# Altium PCB BinaryClock.PcbDoc
Units mm, origin at the board's own origin, x right, y up, seen from the top; angles counter-clockwise.
Board outline 205 x 150 mm, 2 copper layers (Top Layer, Bottom Layer), stack 1.58 mm thick; 113 components, 183 nets, 539 pads, 0 vias.
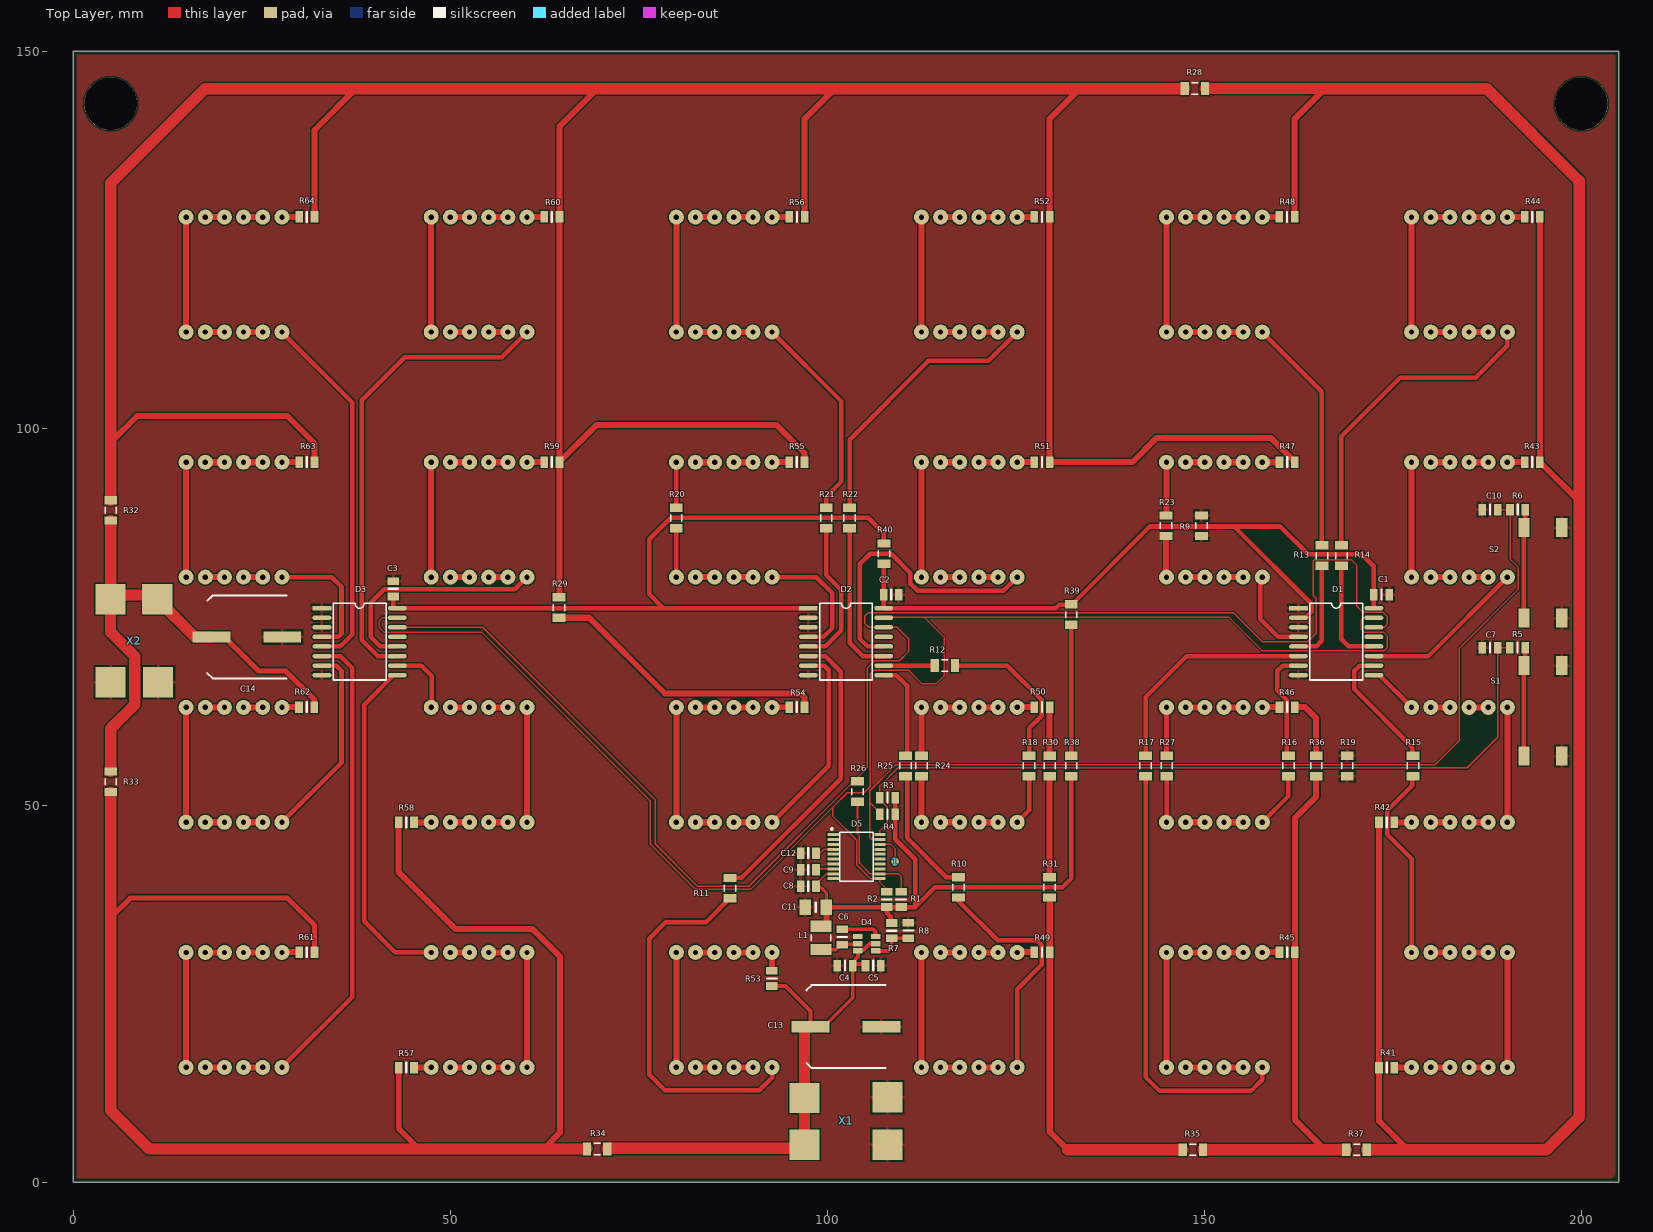
[diagram p0: Top Layer view]
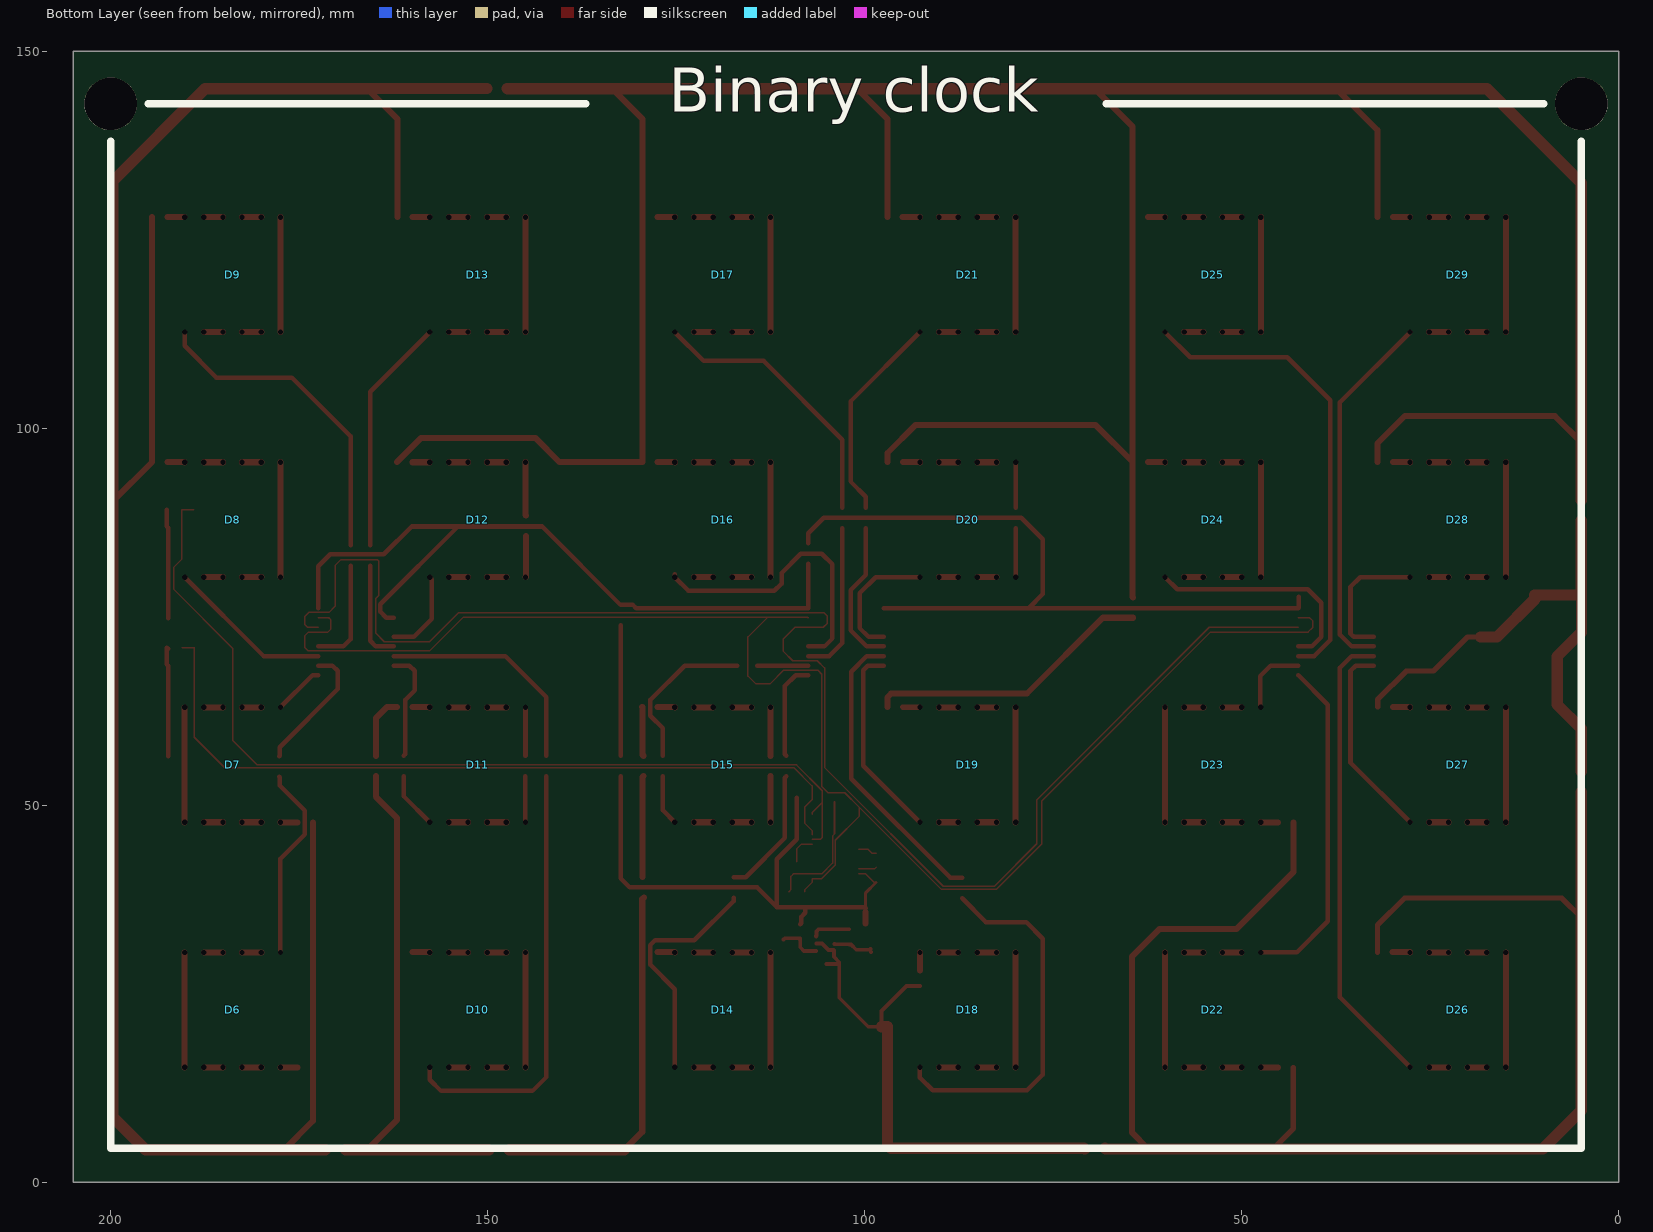
[diagram p1: Bottom Layer view, seen from below]
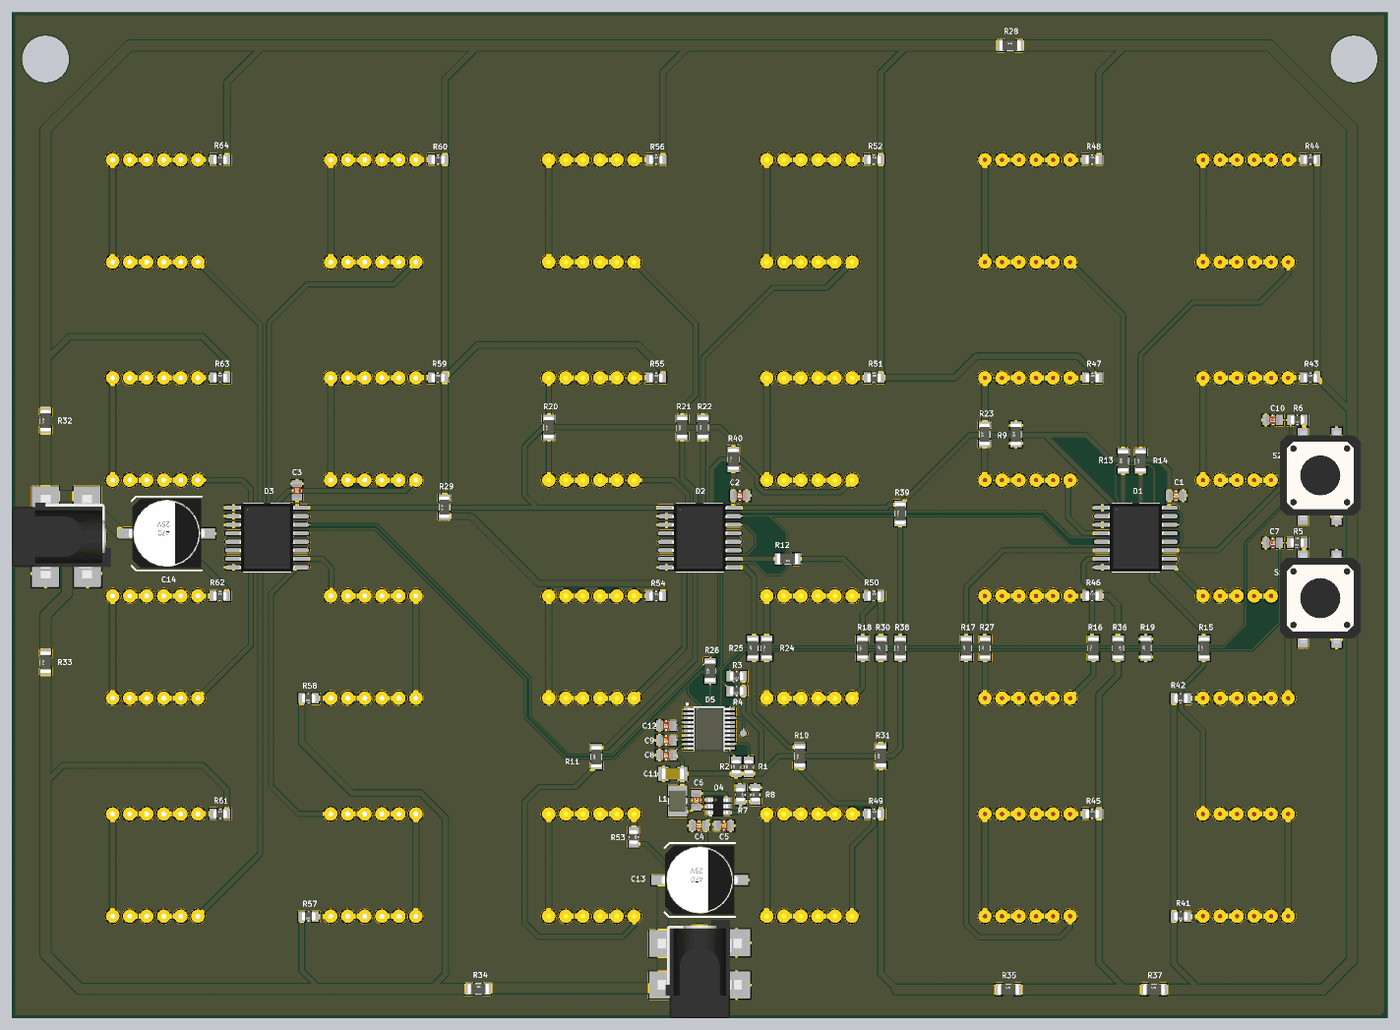
[diagram p2: 3D render of the assembled board from above, using the file's embedded part models]
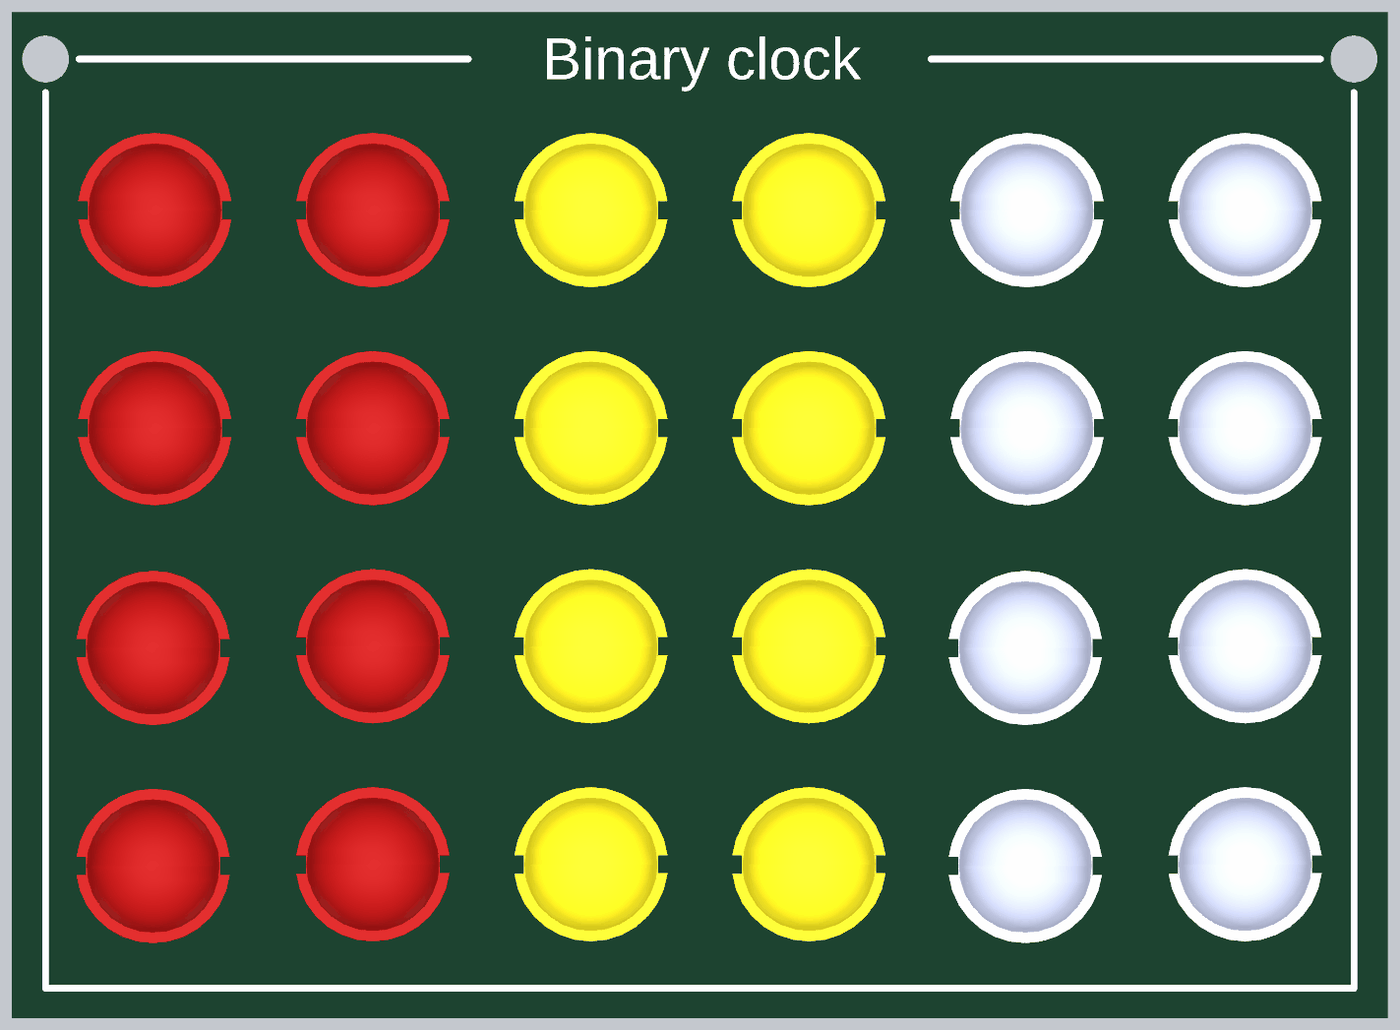
[diagram p3: 3D render of the assembled board from below, using the file's embedded part models]

## Layer stack, top to bottom
Top Solder: solder mask 0.0102, Solder Resist, Dk 3.5
Top Layer: signal copper 0.018
Dielectric 1: dielectric 1.5437, FR-4, Dk 4.8
Bottom Layer: signal copper 0.018
Bottom Solder: solder mask 0.0102, Solder Resist, Dk 3.5

## Board outline
0,0 205,0 205,150 0,150

## Design rules (kind name [scope] priority, off if disabled: settings)
Clearance [All] p1: gap=0.16 ignorepadtopadclearanceinfootprint=FALSE except(0: Arc-Hole Track-Hole SMDPad-Hole THPad-Hole Via-Hole Fill-Hole Poly-Hole Region-Hole Text-Hole)
ComponentClearance [All] p1: gap=0.1 collisioncheckmode=3 verticalgap=0.254 showdistances=FALSE
HoleSize [All] p1: absolutevalues=TRUE maxlimit=10 minlimit=0.025 maxpercent=80.000 minpercent=20.000
MinimumSolderMaskSliver [All] p1: minsoldermaskwidth=0.16
PolygonConnect [All] p1: connectstyle=Relief reliefconductorwidth=0.4 reliefentries=4 polygonreliefangle="90 Angle" airgapwidth=0.254
RoutingVias [All] p1: holewidth=0.711 width=1.27 viastyle="Through Hole" minholewidth=0.711 minwidth=1.27 maxholewidth=0.711 maxwidth=1.27
SolderMaskExpansion SolderMaskExpansion_LED [HasFootprint('DLA/6GD') OR HasFootprint('DLA/6YD')  OR HasFootprint('DLA/6ID')] p1: expansion=0.1 istentingtop=FALSE
SolderMaskExpansion [All] p2: expansion=0.202 istentingtop=FALSE
Width [All] p1: maxlimit=1.5 minlimit=0.16 preferedwidth=0.4 minimp=50.000000 maximp=50.000000 favimp=50.000000
27 further rules are at their usual default settings.

## Classes and differential pairs
component class BinaryClock_Control: 1 C1 C2 C3 C4 C5 C6 C7 C8 C9 C10 C11 C12 C13 C14 D1 D2 D3 D4 D5 L1 R1 R2 R3 R4 R5 R6 R7 R8 R9 R10 R11 R12 R13 R14 R15 R16 R17 R18 R19 R20 R21 R22 R23 R24 R25 R26 R27 R28 R29 R30 R31 R32 R33 R34 R35 R36 R37 R38 R39 R40 S1 S2 X1 X2
component class BinaryClock_LEDs: D6 D7 D8 D9 D10 D11 D12 D13 D14 D15 D16 D17 D18 D19 D20 D21 D22 D23 D24 D25 D26 D27 D28 D29 R41 R42 R43 R44 R45 R46 R47 R48 R49 R50 R51 R52 R53 R54 R55 R56 R57 R58 R59 R60 R61 R62 R63 R64

## Components (designator, comment, footprint, x,y, rotation, side; value= is the part's Value field where it differs from the comment)
1 "Point" point 109,42.5 r0 top
C1 "0805-16 V-X7R-0.1uF±10 %" SMD-0805C 173.5,77.919 r270 top value="0.1 uF"
C2 "0805-16 V-X7R-0.1uF±10 %" SMD-0805C 108.5,77.919 r270 top value="0.1 uF"
C3 "0805-16 V-X7R-0.1uF±10 %" SMD-0805C 42.475,78.681 r0 top value="0.1 uF"
C4 "0805-25 V-X5R-10uF±10 %" SMD-0805C 102.375,28.725 r90 top value="10 uF"
C5 "0805-50 V-X7R-0.1uF±10 %" SMD-0805C 106.1,28.725 r270 top value="0.1 uF"
C6 "0805-16 V-X7R-0.1uF±10 %" SMD-0805C 102,32.525 r180 top value="0.1 uF"
C7 "0805-16 V-X7R-0.1uF±10 %" SMD-0805C 187.9,70.875 r90 top value="0.1 uF"
C8 "0805-16 V-X7R-0.1uF±10 %" SMD-0805C 97.5,39.25 r90 top value="0.1 uF"
C9 "0805-16 V-X7R-1uF±10 %" SMD-0805C 97.5,41.45 r90 top value="1 uF"
C10 "0805-16 V-X7R-0.1uF±10 %" SMD-0805C 187.9,89.2 r90 top value="0.1 uF"
C11 "1206-16 V-X7R-22uF±10 %" SMD-1206C 98.5,36.45 r90 top value="22 uF"
C12 "0805-16 V-X7R-0.1uF±10 %" SMD-0805C 97.5,43.65 r90 top value="0.1 uF"
C13 "10x10.5-50 V-100 uF±20 %" CAP_10x10.5 102.5,20.625 r0 top value="100 uF"
C14 "10x10.5-50 V-100 uF±20 %" CAP_10x10.5 23.05,72.3 r0 top value="100 uF"
D1 "PCF8574T/3.512" SO-16 167.5,71.62 r0 top
D2 "PCF8574T/3.512" SO-16 102.5,71.62 r0 top
D3 "PCF8574T/3.512" SO-16 38.004,71.62 r0 top
D4 "TPS562200DDCT" SOT23-6_M 105.25,31.625 r0 top
D5 "STM8S103F3P6" TSSOP-20 103.9,43.175 r270 top
D6 "DLA/6ID" DLA/6ID 183.85,22.85 r0 bottom
D7 "DLA/6ID" DLA/6ID 183.85,55.35 r0 bottom
D8 "DLA/6ID" DLA/6ID 183.85,87.85 r180 bottom
D9 "DLA/6ID" DLA/6ID 183.85,120.35 r180 bottom
D10 "DLA/6ID" DLA/6ID 151.35,22.85 r180 bottom
D11 "DLA/6ID" DLA/6ID 151.35,55.35 r180 bottom
D12 "DLA/6ID" DLA/6ID 151.35,87.85 r180 bottom
D13 "DLA/6ID" DLA/6ID 151.35,120.35 r180 bottom
D14 "DLA/6YD" DLA/6YD 118.85,22.85 r180 bottom
D15 "DLA/6YD" DLA/6YD 118.85,55.35 r180 bottom
D16 "DLA/6YD" DLA/6YD 118.85,87.85 r180 bottom
D17 "DLA/6YD" DLA/6YD 118.85,120.35 r180 bottom
D18 "DLA/6YD" DLA/6YD 86.35,22.85 r180 bottom
D19 "DLA/6YD" DLA/6YD 86.35,55.35 r180 bottom
D20 "DLA/6YD" DLA/6YD 86.35,87.85 r180 bottom
D21 "DLA/6YD" DLA/6YD 86.35,120.35 r180 bottom
D22 "DLA/6SGD" DLA/6GD 53.85,22.85 r0 bottom
D23 "DLA/6SGD" DLA/6GD 53.85,55.35 r0 bottom
D24 "DLA/6SGD" DLA/6GD 53.85,87.85 r180 bottom
D25 "DLA/6SGD" DLA/6GD 53.85,120.35 r180 bottom
D26 "DLA/6SGD" DLA/6GD 21.35,22.85 r180 bottom
D27 "DLA/6SGD" DLA/6GD 21.35,55.35 r180 bottom
D28 "DLA/6SGD" DLA/6GD 21.35,87.85 r180 bottom
D29 "DLA/6SGD" DLA/6GD 21.35,120.35 r180 bottom
L1 "NLCV32T-4R7M-EF" 1210_M 99.2,32.4 r90 top value="4.7 uH"
R1 "0805±5 %-10 kOhm" SMD-0805-RES 109.8,37.5 r0 top value="10 kOhm"
R2 "0805±5 %-10 kOhm" SMD-0805-RES 107.9,37.5 r0 top value="10 kOhm"
R3 "0805±5 %-10 kOhm" SMD-0805-RES 108,51 r90 top value="10 kOhm"
R4 "0805±5 %-10 kOhm" SMD-0805-RES 108,48.775 r90 top value="10 kOhm"
R5 "0805±5 %-100 Ohm" SMD-0805-RES 191.55,70.9 r90 top value="100 Ohm"
R6 "0805±5 %-100 Ohm" SMD-0805-RES 191.575,89.2 r90 top value="100 Ohm"
R7 "0805±1 %-110 kOhm" SMD-0805-RES 108.575,33.35 r180 top value="110 kOhm"
R8 "0805±1 %-20 kOhm" SMD-0805-RES 110.775,33.375 r0 top value="20 kOhm"
R9 "1206±5 %-0 Ohm" R1206 149.625,87.05 r90 top value="0 Ohm"
R10 "1206±5 %-0 Ohm" R1206 117.4,39.1 r90 top value="0 Ohm"
R11 "1206±5 %-0 Ohm" R1206 87.1,39 r90 top value="0 Ohm"
R12 "1206±5 %-0 Ohm" R1206 115.6,68.5 r180 top value="0 Ohm"
R13 "1206±5 %-0 Ohm" R1206 165.6,83.1 r90 top value="0 Ohm"
R14 "1206±5 %-0 Ohm" R1206 168.2,83.1 r90 top value="0 Ohm"
R15 "1206±5 %-0 Ohm" R1206 177.675,55.2 r90 top value="0 Ohm"
R16 "1206±5 %-0 Ohm" R1206 161.175,55.2 r90 top value="0 Ohm"
R17 "1206±5 %-0 Ohm" R1206 142.225,55.2 r90 top value="0 Ohm"
R18 "1206±5 %-0 Ohm" R1206 126.775,55.2 r90 top value="0 Ohm"
R19 "1206±5 %-0 Ohm" R1206 168.975,55.2 r90 top value="0 Ohm"
R20 "1206±5 %-0 Ohm" R1206 80,88.075 r90 top value="0 Ohm"
R21 "1206±5 %-0 Ohm" R1206 99.875,88.075 r90 top value="0 Ohm"
R22 "1206±5 %-0 Ohm" R1206 102.975,88.075 r90 top value="0 Ohm"
R23 "1206±5 %-0 Ohm" R1206 144.95,87.05 r90 top value="0 Ohm"
R24 "1206±5 %-0 Ohm" R1206 112.5,55.2 r90 top value="0 Ohm"
R25 "1206±5 %-0 Ohm" R1206 110.4,55.2 r90 top value="0 Ohm"
R26 "1206±5 %-0 Ohm" R1206 104.025,51.8 r90 top value="0 Ohm"
R27 "1206±5 %-0 Ohm" R1206 145.025,55.2 r90 top value="0 Ohm"
R28 "1206±5 %-0 Ohm" R1206 148.75,145.025 r0 top value="0 Ohm"
R29 "1206±5 %-0 Ohm" R1206 64.45,76.2 r90 top value="0 Ohm"
R30 "1206±5 %-0 Ohm" R1206 129.525,55.2 r90 top value="0 Ohm"
R31 "1206±5 %-0 Ohm" R1206 129.5,39.1 r90 top value="0 Ohm"
R32 "1206±5 %-0 Ohm" R1206 5,89.1 r90 top value="0 Ohm"
R33 "1206±5 %-0 Ohm" R1206 5,53.1 r90 top value="0 Ohm"
R34 "1206±5 %-0 Ohm" R1206 69.5,4.4 r0 top value="0 Ohm"
R35 "1206±5 %-0 Ohm" R1206 148.5,4.3 r0 top value="0 Ohm"
R36 "1206±5 %-0 Ohm" R1206 164.85,55.2 r270 top value="0 Ohm"
R37 "1206±5 %-0 Ohm" R1206 170.2,4.3 r0 top value="0 Ohm"
R38 "1206±5 %-0 Ohm" R1206 132.375,55.2 r90 top value="0 Ohm"
R39 "1206±5 %-0 Ohm" R1206 132.375,75.275 r90 top value="0 Ohm"
R40 "1206±5 %-0 Ohm" R1206 107.525,83.35 r90 top value="0 Ohm"
R41 "0805±1 %-? kOhm" SMD-0805-RES 174.2,15.2 r90 top value="? Ohm"
R42 "0805±1 %-? kOhm" SMD-0805-RES 174.2,47.7 r90 top value="? Ohm"
R43 "0805±1 %-? kOhm" SMD-0805-RES 193.5,95.5 r270 top value="? Ohm"
R44 "0805±1 %-? kOhm" SMD-0805-RES 193.5,128 r270 top value="? Ohm"
R45 "0805±1 %-? kOhm" SMD-0805-RES 161,30.5 r270 top value="? Ohm"
R46 "0805±1 %-? kOhm" SMD-0805-RES 161,63 r270 top value="? Ohm"
R47 "0805±1 %-? kOhm" SMD-0805-RES 161,95.5 r270 top value="? Ohm"
R48 "0805±1 %-? kOhm" SMD-0805-RES 160.984,128 r270 top value="? Ohm"
R49 "0805±1 %-? kOhm" SMD-0805-RES 128.5,30.5 r270 top value="? Ohm"
R50 "0805±1 %-? kOhm" SMD-0805-RES 128.5,63 r270 top value="? Ohm"
R51 "0805±1 %-? kOhm" SMD-0805-RES 128.484,95.5 r270 top value="? Ohm"
R52 "0805±1 %-? kOhm" SMD-0805-RES 128.484,128 r270 top value="? Ohm"
R53 "0805±1 %-? kOhm" SMD-0805-RES 92.675,27.025 r180 top value="? Ohm"
R54 "0805±1 %-? kOhm" SMD-0805-RES 95.984,63 r270 top value="? Ohm"
R55 "0805±1 %-? kOhm" SMD-0805-RES 95.984,95.5 r270 top value="? Ohm"
R56 "0805±1 %-? kOhm" SMD-0805-RES 96,128 r270 top value="? Ohm"
R57 "0805±1 %-? kOhm" SMD-0805-RES 44.2,15.2 r90 top value="? Ohm"
R58 "0805±1 %-? kOhm" SMD-0805-RES 44.2,47.7 r90 top value="? Ohm"
R59 "0805±1 %-? kOhm" SMD-0805-RES 63.484,95.5 r270 top value="? Ohm"
R60 "0805±1 %-? kOhm" SMD-0805-RES 63.5,128 r270 top value="? Ohm"
R61 "0805±1 %-? kOhm" SMD-0805-RES 31,30.5 r270 top value="? Ohm"
R62 "0805±1 %-? kOhm" SMD-0805-RES 30.984,63 r270 top value="? Ohm"
R63 "0805±1 %-? kOhm" SMD-0805-RES 31,95.5 r270 top value="? Ohm"
R64 "0805±1 %-? kOhm" SMD-0805-RES 31,128 r270 top value="? Ohm"
S1 "1243SHIM-160G-G" 1243S 194.9,62.5 r90 top
S2 "1243SHIM-160G-G" 1243S 194.9,80.8 r90 top
X1 "DC-005-5A-2.5-SMT" PJ_2.5MM_SMT 102.5,8.125 r0 top
X2 "DC-005-5A-2.5-SMT" PJ_2.5MM_SMT 8.125,71.8 r270 top

## Footprints (in the part's own frame and the unit in brackets; to place one, negate y for a bottom-side part, rotate by r counter-clockwise, add the part's x,y. Pads: shape width x height; smd on the part's side, far side on the other; paste and mask are expansions set on the pad)
1210_M [mm] "Body 3.2x2.5mm, IPC Low Density"
  rect 1.5x2.8 smd: 1(-1.55,0) 2(1.55,0)
  silkscreen extent -0.4,-1.3 0.4,1.3, body extent -1.6,-1.25 1.6,1.25, height 1.9
1243S [mm] "12x12 tact button SMD"
  rect 2.5x1.5 smd: 1(6,2.5) 1_1(-6,2.5) 2(-6,-2.5) 2(6,-2.5)
  body extent -6.59,-6.08 6.86,5.92, height 4
CAP_10x10.5 [mm] "Aluminum electrolytic capacitor with size 10x10.5 mm"
  rect 5x1.5 smd: 1(-4.7,0) 2(4.7,0)
  silkscreen extent -5.25,-5.5 5.25,5.5, body extent -5.65,-5.15 5.65,5.15, height 10.8
DLA/6GD [mm] "20mm BIG LAMP"
  round 0 / inner round 0 / far side round 2 hole 0.7 unplated: 1(-6.35,7.62) 2(-3.81,7.62) 3(-1.27,7.62) 4(1.27,7.62) 5(3.81,7.62) 6(6.35,7.62) 7(6.35,-7.62) 8(3.81,-7.62) 9(1.27,-7.62) 10(-1.27,-7.62) 11(-3.81,-7.62) 12(-6.35,-7.62)
  body extent -11.29,-11.37 11.55,11.63, height 12.65
DLA/6ID [mm] "20mm BIG LAMP"
  round 0 / inner round 0 / far side round 2 hole 0.7 unplated: 1(-6.35,7.62) 2(-3.81,7.62) 3(-1.27,7.62) 4(1.27,7.62) 5(3.81,7.62) 6(6.35,7.62) 7(6.35,-7.62) 8(3.81,-7.62) 9(1.27,-7.62) 10(-1.27,-7.62) 11(-3.81,-7.62) 12(-6.35,-7.62)
  body extent -11.29,-11.37 11.55,11.63, height 12.65
DLA/6YD [mm] "20mm BIG LAMP"
  round 0 / inner round 0 / far side round 2 hole 0.7 unplated: 1(-6.35,7.62) 2(-3.81,7.62) 3(-1.27,7.62) 4(1.27,7.62) 5(3.81,7.62) 6(6.35,7.62) 7(6.35,-7.62) 8(3.81,-7.62) 9(1.27,-7.62) 10(-1.27,-7.62) 11(-3.81,-7.62) 12(-6.35,-7.62)
  body extent -11.29,-11.37 11.55,11.63, height 12.65
PJ_2.5MM_SMT [mm] "Power jack 2.5mm SMT"
  rect 4x4 smd: 1(-5.5,-3.15) 1(-5.5,3.05) 2(5.5,-3.15) 2(5.5,3.15)
  body extent -6.25,-8.1 6.25,6.6, height 11
point [mm] "Point; 1 Position"
  round 1 smd: 1(0,0)
R1206 [mm] "Chip resistor, Body 3.2x1.6mm, IPC High Density"
  rect 1.1x1.7 smd: 1(-1.35,0) 2(1.35,0)
  silkscreen extent -0.4,-0.75 0.4,0.75, body extent -1.6,-0.8 1.6,0.8, height 1
SMD-0805-RES [mil]
  rect 60x40 smd: 1(0,40) 2(0,-40)
  silkscreen extent -25,0 25,0, body extent -24,-39 26,39, height 31
SMD-0805C [mil]
  rect 60x40 smd: 1(0,40) 2(0,-40)
  silkscreen extent -25,0 25,0, body extent -25,-39 25,39, height 35
SMD-1206C [mil]
  rect 80x60 smd: 1(0,55) 2(0,-55)
  silkscreen extent -25,0 25,0, body extent -31,-63 32,63, height 39
SO-16 [mm]
  rect 2.5x0.6 smd: 1(-5,4.5)
  oval 2.5x0.6 smd: 2(-5,3.23) 3(-5,1.96) 4(-5,0.69) 5(-5,-0.58) 6(-5,-1.85) 7(-5,-3.12) 8(-5,-4.39) 9(5,-4.39) 10(5,-3.12) 11(5,-1.85) 12(5,-0.58) 13(5,0.69) 14(5,1.96) 15(5,3.23) 16(5,4.5)
  silkscreen extent -3.5,-5.02 3.5,5.14, body extent -5.15,-5.05 5.15,5.15
SOT23-6_M [mm] "SOT23, 6-Leads, Body 2.9x1.6mm, Pitch 0.95mm, Lead Span 2.7mm, IPC Low Density"
  rect 1.3x0.7 smd: 1(-1.2,0.95) 2(-1.2,0) 3(-1.2,-0.95) 4(1.2,-0.95) 5(1.2,0) 6(1.2,0.95)
  body extent -1.5,-1.5 1.5,1.5, height 1.3
TSSOP-20 [mm] "TSSOP, Plastic; 20 Leads; Body Width 5.3 mm; Pitch 0.65 mm"
  rect 0.4x1.5 smd: 1(-2.925,-3.1) 2(-2.275,-3.1) 3(-1.625,-3.1) 4(-0.975,-3.1) 5(-0.325,-3.1) 6(0.325,-3.1) 7(0.975,-3.1) 8(1.625,-3.1) 9(2.275,-3.1) 10(2.925,-3.1) 11(2.925,3.1) 12(2.275,3.1) 13(1.625,3.1) 14(0.975,3.1) 15(0.325,3.1) 16(-0.325,3.1) 17(-0.975,3.1) 18(-1.625,3.1) 19(-2.275,3.1) 20(-2.925,3.1)
  silkscreen extent -3.8,-3.4 3.25,2.2, body extent -3.15,-3.16 3.35,3.11, height 1.1

## Part data
C1 C2 C3 C6 C7 C8 C9 C10 C12: library part Cap, "Capacitor", Manufacturer=Murata, ComponentLink1Description=Datasheet
C4 C5 C11: library part Cap, "Capacitor", ComponentLink1Description=Datasheet
C13 C14: library part Cap_el, "Electrolytic capacitor", ComponentLink1Description=Datasheet
D1 D2 D3: library part PCF8574, "Remote 8-bit I/O expander for I2C bus", Manufacturer=NXP, ComponentLink1Description=Datasheet, ComponentLink1URL=https://www.nxp.com/docs/en/data-sheet/PCF8574_PCF8574A.pdf
D4: library part TPS562200, "4.5-V To 17-V Input, 2-A, 3-A Synchronous Step-Down Voltage Regulator", Manufacturer="Texas Instruments", ComponentLink1Description=Datasheet, ComponentLink1URL=http://www.ti.com/lit/ds/symlink/tps562200.pdf
D5: library part STM8S103FxP, "Access line, 16 MHz STM8S 8-bit MCU, up to 8 Kbytes Flash,   data EEPROM,10-bit ADC, 3 timers, UART, SPI, I²C", Manufacturer=STMicroelectronics, ComponentLink1Description=Datasheet, ComponentLink1URL=http://www.st.com/content/ccc/resource/technical/document/datasheet/ce/13/13/03/a9/a4/42/8f/CD00226640.pdf/files/CD00226640.pdf/jcr:content/translations/en.CD00226640.pdf
D6 D7 D8 D9 D10 D11 D12 D13 D14 D15 D16 D17 D18 D19 D20 D21 D22 D23 D24 D25 D26 D27 D28 D29: library part DLA, "20mm BIG LAMP", Manufacturer=Kingbright, ComponentLink1Description=Datasheet
  D6 D7 D8 D9 D10 D11 D12 D13: ComponentLink1URL=http://www.kingbright.com/attachments/file/psearch/000/00/00/DLA-6ID(Ver.14A).pdf
  D14 D15 D16 D17 D18 D19 D20 D21: ComponentLink1URL=http://www.kingbright.com/attachments/file/psearch/000/00/20160808bak/DLA-6YD(Ver.12A).pdf
  D22 D23 D24 D25 D26 D27 D28 D29: ComponentLink1URL=http://www.kingbright.com/attachments/file/psearch/000/00/20160808bak/DLA-6SGD(Ver.12A).pdf
L1: library part Inductor, "Inductor", Manufacturer=TDK, ComponentLink1Description=Datasheet, ComponentLink1URL=https://product.tdk.com/info/en/catalog/datasheets/inductor_commercial_decoupling_nlcv32-ef_en.pdf
R1 R2 R3 R4 R5 R6 R7 R8 R9 R10 R11 R12 R13 R14 R15 R16 R17 R18 R19 R20 R21 R22 R23 R24 R25 R26 R27 R28 R29 R30 R31 R32 R33 R34 R35 R36 R37 R38 R39 R40 R41 R42 R43 R44 R45 R46 R47 R48 R49 R50 R51 R52 R53 R54 R55 R56 R57 R58 R59 R60 R61 R62 R63 R64: library part Res, "Resistor", ComponentLink1Description=Datasheet
S1 S2: library part button, "Tact button SPST", Manufacturer=Switronic, ComponentLink1Description=Datasheet, ComponentLink1URL=http://www.voltmaster.ru/pdf/datasheets/switronic/Cata_A09.gif
X1 X2: library part Power_Jack_SMT_2.5mm, "Power jack 2.5 mm SMT connector", Manufacter="XKB Connectivity", Datasheet=https://datasheet.lcsc.com/lcsc/2208041700_XKB-Connectivity-DC-005-5A-2-5-SMT_C319133.pdf

## Free pads (board coordinates)
  round 7 hole 7 unplated mask+0: 2(5,143) 2(200,143)

## Nets (pads, with @x,y where several pads share a name; then routed paths per layer and width w, separated by ;. In a path a pad name is that pad's centre, name@x,y a point inside that pad or via, vN(x,y) a via of type N, cw(c..) or ccw(c..) an arc to the next point about the centre after c; other vN are vias at no path point)
5V: C1.2 C2.2 C3.2 C8.2 C11.2 D1.2 D1.16 D2.1 D2.16 D3.16 D5.9 L1.2 R1.2 R2.2 R3.2 R4.2 R7.2 R38.1 R38.2 R39.1 R39.2 R40.1 R40.2 | length 293.8
  Top Layer w0.2: C8.2@98.516,39.75 98.75,39.75 99.9,40.9 D5.9
  Top Layer w0.4: C8.2@98.516,39.75 99.897,38.369 99.897,36.312 C11.2@99.897,35.858
  Top Layer w0.6: C3.2@42.475,77.659 42.475,76.145 42.5,76.12 78.28,76.12 ; D2.1 78.28,76.12 ; C11.2@99.897,36.312 100.069,36.484 R2.2 ; R40.1 107.484,81.959 C2.2 107.484,76.136 D2.16 130.32,76.12 130.75,76.55 132.4,76.55 142.8,86.95 153.95,86.95 ; R40.2 107.525,86.05 105.45,88.125 79.275,88.125 76.4,85.25 76.4,78 78.28,76.12 ; R7.2@108.575,34.191 108.45,34.316 108.45,35.175 107.9,35.725 R2.2 ; R3.2 R4.2 109.016,45.484 111.684,42.816 111.684,36.484 ; R38.1@132.35,53.85 132.4,53.8 132.4,40.3 131.2,39.1 114.3,39.1 111.684,36.484 ; R38.2@132.35,56.55 132.4,56.6 R39.1@132.4,73.85 ; D1.2 163.45,74.85 164.275,75.675 164.275,76.625 153.95,86.95 ; D1.16 172.484,76.136 C1.2 172.484,81.666 170.9,83.25 163.775,83.25 160.075,86.95 153.95,86.95 ; R2.2 111.684,36.484
  Top Layer w0.8: L1.2@99.897,34.313 C11.2@99.897,35.858
15V: C4.2 C5.2 C13.1 C14.1 D4.3 D4.5 R28.1 R28.2 R29.1 R29.2 R30.1 R30.2 R31.1 R31.2 R32.1 R32.2 R33.1 R33.2 R34.1 R34.2 R35.1 R35.2 R36.1 R36.2 R37.1 R37.2 R41.1 R42.1 R43.1 R44.1 R45.1 R46.1 R47.1 R48.1 R49.1 R50.1 R51.1 R52.1 R53.1 R54.1 R55.1 R56.1 R57.1 R58.1 R59.1 R60.1 R61.1 R62.1 R63.1 R64.1 X1.1 X2.1 | length 1304
  Top Layer w0.5: R53.1 94.491,26.009 97.8,22.7 C13.1 99.55,20.625 103.391,24.466 C4.2 C4.2@103.391,28.925 ; C5.2@105.084,28.925 C4.2@103.391,28.925 ; D4.5 106.425,31.65 105.7,31.65 104.825,30.775 104.15,30.775 104.1,30.725 104.1,29.888 103.391,29.179 C4.2@103.391,28.925
  Top Layer w0.7: 5,35.1 7.6,37.7 28.4,37.7 32.016,34.084 R61.1 ; C14.1 20.1,72.3 24.6,67.8 28.2,67.8 32,64 R62.1 ; R57.1 43.184,7.116 45.9,4.4
  Top Layer w0.8: 5,98.1 8.5,101.6 28.4,101.6 32.016,97.984 R63.1 ; R64.1 32.016,139.516 37.5,145 ; R58.1 43.184,41.116 50.7,33.6 60.9,33.6 64.6,29.9 64.6,6.6 62.4,4.4 ; R29.1 68.45,74.85 78.5,64.8 96.5,64.8 97,64.3 R54.1 ; R29.2 64.5,77.6 R59.1 ; 69.5,145 64.516,140.016 R60.1 64.5,127.984 R59.1 ; R55.1 97,96.7 93.3,100.4 69.4,100.4 R59.1 ; R56.1 97.016,141.016 101,145 ; R31.1@129.3,37.75 129.516,37.534 R49.1 129.516,6.684 131.9,4.3 ; R30.1@129.375,53.85 129.5,53.725 R31.2 ; R30.2@129.375,56.55 129.5,56.675 129.5,62.984 R50.1 ; 133.5,145 129.5,141 R52.1 R51.1 140.5,95.5 143.7,98.7 158.846,98.7 162.016,95.53 R47.1 ; R48.1 162,141 166,145 165.975,145.025 ; R46.1 163.375,63 164.85,61.525 R36.1 ; R36.2 164.85,51.118 162.016,48.284 R45.1 162.016,8.284 166,4.3 ; R42.1 R41.1 173.184,8.116 177,4.3 ; R44.1 R43.1 199.716,90.3
  Top Layer w1.5: R33.1 5,35.1 5,9.5 10.1,4.4 45.9,4.4 62.4,4.4 68.05,4.4 R34.1@68.15,4.5 ; R33.2 5,60.15 8.2,63.35 8.2,69.712 4.975,72.937 4.975,77.3 4.975,77.9 X2.1@5,77.925 ; R32.1 X2.1@5,77.925 ; R32.2 5,98.1 5,132.5 17.5,145 37.5,145 69.5,145 101,145 133.5,145 147.375,145 R28.1 ; X2.1@11.175,77.3 16.175,72.3 C14.1 ; X2.1@11.175,77.875 5.05,77.875 X2.1@5,77.925 ; R34.2 70.95,4.5 96.525,4.5 97,4.975 97,11.175 97,20.625 C13.1 ; 131.9,4.3 R35.1 ; R35.2 166,4.3 R37.1 ; R28.2 165.975,145.025 ; 166,145 187.5,145 199.716,132.784 199.716,90.3 199.716,8.616 195.4,4.3 177,4.3 R37.2
BUTTON1: C7.2 D5.20 R3.1 R5.1 | length 105.3
  Top Layer w0.2: D5.20 107,46.625 107.95,47.575 107.95,49.78 106.984,50.746 R3.1 107,51.016 107,52.55 109.4,54.95 184.875,54.95 188.925,59 188.925,70.859 188.966,70.9 R5.1
BUTTON2: C10.2 D5.19 R4.1 R6.1 | length 126.7
  Top Layer w0.2: R4.1 106.984,49.029 105.653,50.36 ; D5.19 105.909,45.45 105.653,45.705 105.653,50.36 ; C10.2@188.966,89.2 R6.1 190.559,82.641 191.675,81.525 191.675,78.65 183.84,70.815 183.84,61.24 183.825,61.225 183.825,58.575 180.6,55.35 109.05,55.35 109.05,55.316 105.653,51.919 105.653,50.36
GND: C1.1 C2.1 C3.1 C4.1 C5.1 C7.1 C8.1 C9.1 C10.1 C11.1 C12.1 C13.2 C14.2 D1.1 D1.3 D1.8 D2.2 D2.3 D2.8 D3.1 D3.2 D3.3 D3.8 D4.1 D5.7 R8.1 R9.1 R9.2 R19.1 R19.2 S1.2 S2.2 X1.2 X2.2
LED1: D1.10 D6.12 R15.1 R15.2 | length 43.5
  Top Layer w0.6: D1.10 170.6,68.5 169.9,67.8 169.9,65.4 177.6,57.7 177.6,56.55 R15.2@177.675,56.475 ; D6.12 177.5,42.868 174.248,46.12 174.248,49.252 177.6,52.604 177.6,53.7 R15.1@177.675,53.775
LED1_1: D6.2 D6.3 | length 2.5
  Top Layer w0.8: D6.2 D6.3
LED1_2: D6.4 D6.5 | length 2.5
  Top Layer w0.8: D6.4 D6.5
LED1_3: D6.6 D6.7 | length 15.2
  Top Layer w0.8: D6.6 D6.7
LED1_4: D6.8 D6.9 | length 2.5
  Top Layer w0.8: D6.9 D6.8
LED1_5: D6.10 D6.11 | length 2.5
  Top Layer w0.8: D6.11 D6.10
LED2: D1.9 D7.12 | length 6.8
  Top Layer w0.6: D1.9 173.24,67.23 D7.12
LED2_1: D7.2 D7.3 | length 2.5
  Top Layer w0.8: D7.2 D7.3
LED2_2: D7.4 D7.5 | length 2.5
  Top Layer w0.8: D7.4 D7.5
LED2_3: D7.6 D7.7 | length 15.2
  Top Layer w0.8: D7.6 D7.7
LED2_4: D7.8 D7.9 | length 2.5
  Top Layer w0.8: D7.9 D7.8
LED2_5: D7.10 D7.11 | length 2.5
  Top Layer w0.8: D7.11 D7.10
LED3: D1.11 D8.12 | length 22
  Top Layer w0.6: D1.11 179.74,69.77 D8.12
LED3_1: D8.2 D8.3 | length 2.5
  Top Layer w0.8: D8.3 D8.2
LED3_2: D8.4 D8.5 | length 2.5
  Top Layer w0.8: D8.5 D8.4
LED3_3: D8.6 D8.7 | length 15.2
  Top Layer w0.8: D8.7 D8.6
LED3_4: D8.8 D8.9 | length 2.5
  Top Layer w0.8: D8.8 D8.9
LED3_5: D8.10 D8.11 | length 2.5
  Top Layer w0.8: D8.10 D8.11
LED4: D1.12 D9.12 R14.1 R14.2 | length 57.7
  Top Layer w0.6: R14.1 168.2,72 169.16,71.04 D1.12 ; R14.2 168.2,98.9 176,106.7 186,106.7 190.2,110.9 D9.12
LED4_1: D9.2 D9.3 | length 2.5
  Top Layer w0.8: D9.3 D9.2
LED4_2: D9.4 D9.5 | length 2.5
  Top Layer w0.8: D9.5 D9.4
LED4_3: D9.6 D9.7 | length 15.2
  Top Layer w0.8: D9.7 D9.6
LED4_4: D9.8 D9.9 | length 2.5
  Top Layer w0.8: D9.8 D9.9
LED4_5: D9.10 D9.11 | length 2.5
  Top Layer w0.8: D9.10 D9.11
LED5: D1.6 D10.12 R17.1 R17.2 | length 88.7
  Top Layer w0.6: R17.1 142.225,13.95 144.075,12.1 156.2,12.1 157.7,13.6 D10.12 ; R17.2 142.225,64.325 147.67,69.77 D1.6
LED5_1: D10.2 D10.3 | length 2.5
  Top Layer w0.8: D10.3 D10.2
LED5_2: D10.4 D10.5 | length 2.5
  Top Layer w0.8: D10.5 D10.4
LED5_3: D10.6 D10.7 | length 15.2
  Top Layer w0.8: D10.7 D10.6
LED5_4: D10.8 D10.9 | length 2.5
  Top Layer w0.8: D10.8 D10.9
LED5_5: D10.10 D10.11 | length 2.5
  Top Layer w0.8: D10.10 D10.11
LED6: D1.7 D11.12 R16.1 R16.2 | length 22.5
  Top Layer w0.6: D11.12 161.175,51.205 R16.1 ; R16.2 160.952,56.773 160.952,63.953 159.7,65.205 159.7,67.8 160.4,68.5 D1.7
LED6_1: D11.2 D11.3 | length 2.5
  Top Layer w0.8: D11.3 D11.2
LED6_2: D11.4 D11.5 | length 2.5
  Top Layer w0.8: D11.5 D11.4
LED6_3: D11.6 D11.7 R27.1 R27.2 | length 12.6
  Top Layer w0.6: D11.7 145.025,47.755 R27.1 ; D11.6 145,56.575 R27.2
LED6_4: D11.8 D11.9 | length 2.5
  Top Layer w0.8: D11.8 D11.9
LED6_5: D11.10 D11.11 | length 2.5
  Top Layer w0.8: D11.10 D11.11
LED7: D1.4 D12.12 | length 11.7
  Top Layer w0.6: D12.12 157.4,79.93 157.4,74.7 159.79,72.31 D1.4
LED7_1: D12.2 D12.3 | length 2.5
  Top Layer w0.8: D12.3 D12.2
LED7_2: D12.4 D12.5 | length 2.5
  Top Layer w0.8: D12.5 D12.4
LED7_3: D12.6 D12.7 R23.1 R23.2 | length 12.6
  Top Layer w0.8: R23.1 144.95,80.28 D12.7 ; R23.2 145,88.45 D12.6
LED7_4: D12.8 D12.9 | length 2.5
  Top Layer w0.8: D12.8 D12.9
LED7_5: D12.10 D12.11 | length 2.5
  Top Layer w0.8: D12.10 D12.11
LED8: D1.5 D13.12 R13.1 R13.2 | length 44.9
  Top Layer w0.6: D13.12 165.6,104.83 R13.2 ; D1.5 164.84,71.04 165.6,71.8 R13.1
LED8_1: D13.2 D13.3 | length 2.5
  Top Layer w0.8: D13.3 D13.2
LED8_2: D13.4 D13.5 | length 2.5
  Top Layer w0.8: D13.5 D13.4
LED8_3: D13.6 D13.7 | length 15.2
  Top Layer w0.8: D13.7 D13.6
LED8_4: D13.8 D13.9 | length 2.5
  Top Layer w0.8: D13.8 D13.9
LED8_5: D13.10 D13.11 | length 2.5
  Top Layer w0.8: D13.10 D13.11
LED9: D2.9 D14.12 R10.1 R10.2 R25.1 R25.2 | length 61.8
  Top Layer w0.6: D2.9 109.17,67.23 110.6,65.8 110.6,56.75 R25.2 ; R25.1 110.6,53.65 110.6,45.65 115.8,40.45 R10.2 ; R10.1 117.4,37.284 122.604,32.08 127.825,32.08 128.452,31.453 128.452,28.86 125.2,25.608 D14.12
LED9_1: D14.2 D14.3 | length 2.5
  Top Layer w0.8: D14.3 D14.2
LED9_2: D14.4 D14.5 | length 2.5
  Top Layer w0.8: D14.5 D14.4
LED9_3: D14.6 D14.7 | length 15.2
  Top Layer w0.8: D14.7 D14.6
LED9_4: D14.8 D14.9 | length 2.5
  Top Layer w0.8: D14.8 D14.9
LED9_5: D14.10 D14.11 | length 2.5
  Top Layer w0.8: D14.10 D14.11
LED10: D2.10 D15.12 R12.1 R12.2 R18.1 R18.2 | length 35
  Top Layer w0.6: D2.10 R12.2 ; R12.1 123.905,68.5 128.452,63.953 128.452,61.852 126.775,60.175 R18.2 ; D15.12 126.775,49.305 R18.1
LED10_1: D15.2 D15.3 | length 2.5
  Top Layer w0.8: D15.3 D15.2
LED10_2: D15.4 D15.5 | length 2.5
  Top Layer w0.8: D15.5 D15.4
LED10_3: D15.6 D15.7 R24.1 R24.2 | length 12.5
  Top Layer w0.8: D15.7 R24.1 ; R24.2 D15.6
LED10_4: D15.8 D15.9 | length 2.5
  Top Layer w0.8: D15.8 D15.9
LED10_5: D15.10 D15.11 | length 2.5
  Top Layer w0.8: D15.10 D15.11
LED11: D2.12 D16.12 | length 38.9
  Top Layer w0.6: D2.12 105.36,71.04 104.3,72.1 104.3,81.925 105.7,83.325 108.5,83.325 111.04,80.785 111.04,79.385 112,78.425 123.395,78.425 D16.12 D16.12@125.2,80.6
LED11_1: D16.2 D16.3 | length 2.5
  Top Layer w0.8: D16.3 D16.2
LED11_2: D16.4 D16.5 | length 2.5
  Top Layer w0.8: D16.5 D16.4
LED11_3: D16.6 D16.7 | length 15.2
  Top Layer w0.8: D16.7 D16.6
LED11_4: D16.8 D16.9 | length 2.5
  Top Layer w0.8: D16.8 D16.9
LED11_5: D16.10 D16.11 | length 2.5
  Top Layer w0.8: D16.10 D16.11
LED12: D2.11 D17.12 R22.1 R22.2 | length 57.6
  Top Layer w0.6: R22.1 103,86.7 103,71.5 104.73,69.77 D2.11 ; R22.2 102.975,98.475 113.4,108.9 121.37,108.9 D17.12
LED12_1: D17.2 D17.3 | length 2.5
  Top Layer w0.8: D17.3 D17.2
LED12_2: D17.4 D17.5 | length 2.5
  Top Layer w0.8: D17.5 D17.4
LED12_3: D17.6 D17.7 | length 15.2
  Top Layer w0.8: D17.7 D17.6
LED12_4: D17.8 D17.9 | length 2.5
  Top Layer w0.8: D17.8 D17.9
LED12_5: D17.10 D17.11 | length 2.5
  Top Layer w0.8: D17.10 D17.11
LED13: D2.6 D18.12 R11.1 R11.2 | length 89.7
  Top Layer w0.6: R11.1 83.95,34.5 78.6,34.5 76.4,32.3 76.4,14.275 78.5,12.175 91,12.175 92.7,13.875 D18.12 ; R11.2 88.65,40.35 101.8,53.5 101.8,67.7 99.73,69.77 D2.6
LED13_1: D18.2 D18.3 | length 2.5
  Top Layer w0.8: D18.3 D18.2
LED13_2: D18.4 D18.5 | length 2.5
  Top Layer w0.8: D18.5 D18.4
LED13_3: D18.6 D18.7 | length 15.2
  Top Layer w0.8: D18.7 D18.6
LED13_4: D18.8 D18.9 | length 2.5
  Top Layer w0.8: D18.8 D18.9
LED13_5: D18.10 D18.11 | length 2.5
  Top Layer w0.8: D18.10 D18.11
LED14: D2.7 D19.12 | length 26.2
  Top Layer w0.6: D19.12 100.2,55.23 100.2,67.9 99.6,68.5 D2.7
LED14_1: D19.2 D19.3 | length 2.5
  Top Layer w0.8: D19.3 D19.2
LED14_2: D19.4 D19.5 | length 2.5
  Top Layer w0.8: D19.5 D19.4
LED14_3: D19.6 D19.7 | length 15.2
  Top Layer w0.8: D19.7 D19.6
LED14_4: D19.8 D19.9 | length 2.5
  Top Layer w0.8: D19.8 D19.9
LED14_5: D19.10 D19.11 | length 2.5
  Top Layer w0.8: D19.10 D19.11
LED15: D2.4 D20.12 | length 17.2
  Top Layer w0.6: D20.12 98.57,80.23 100.7,78.1 100.7,73.5 99.51,72.31 D2.4
LED15_1: D20.2 D20.3 | length 2.5
  Top Layer w0.8: D20.3 D20.2
LED15_2: D20.4 D20.5 | length 2.5
  Top Layer w0.8: D20.5 D20.4
LED15_3: D20.6 D20.7 R20.1 R20.2 | length 12.5
  Top Layer w0.6: D20.7 R20.1 ; R20.2 D20.6
LED15_4: D20.8 D20.9 | length 2.5
  Top Layer w0.8: D20.8 D20.9
LED15_5: D20.10 D20.11 | length 2.5
  Top Layer w0.8: D20.10 D20.11
LED16: D2.5 D21.12 R21.1 R21.2 | length 47.6
  Top Layer w0.6: D21.12 101.9,103.53 101.9,92.925 99.875,90.9 R21.2 ; D2.5 99.74,71.04 101.9,73.2 101.9,78.5 99.875,80.525 R21.1
LED16_1: D21.2 D21.3 | length 2.5
  Top Layer w0.8: D21.3 D21.2
LED16_2: D21.4 D21.5 | length 2.5
  Top Layer w0.8: D21.5 D21.4
LED16_3: D21.6 D21.7 | length 15.2
  Top Layer w0.8: D21.7 D21.6
LED16_4: D21.8 D21.9 | length 2.5
  Top Layer w0.8: D21.8 D21.9
LED16_5: D21.10 D21.11 | length 2.5
  Top Layer w0.8: D21.10 D21.11
LED17: D3.9 D22.12 | length 44.9
  Top Layer w0.6: D3.9@42.5,67.23 38.6,63.33 38.6,34.6 42.73,30.47 D22.12
LED17_1: D22.2 D22.3 | length 2.5
  Top Layer w0.8: D22.2 D22.3
LED17_2: D22.4 D22.5 | length 2.5
  Top Layer w0.8: D22.4 D22.5
LED17_3: D22.6 D22.7 | length 15.2
  Top Layer w0.8: D22.6 D22.7
LED17_4: D22.8 D22.9 | length 2.5
  Top Layer w0.8: D22.9 D22.8
LED17_5: D22.10 D22.11 | length 2.5
  Top Layer w0.8: D22.11 D22.10
LED18: D3.10 D23.12 | length 9.9
  Top Layer w0.6: D3.10@42.5,68.5 46.2,68.5 47.6,67.1 47.6,63.07 D23.12
LED18_1: D23.2 D23.3 | length 2.5
  Top Layer w0.8: D23.2 D23.3
LED18_2: D23.4 D23.5 | length 2.5
  Top Layer w0.8: D23.4 D23.5
LED18_3: D23.6 D23.7 | length 15.2
  Top Layer w0.8: D23.6 D23.7
LED18_4: D23.8 D23.9 | length 2.5
  Top Layer w0.8: D23.9 D23.8
LED18_5: D23.10 D23.11 | length 2.5
  Top Layer w0.8: D23.11 D23.10
LED19: D3.12 D24.12 | length 30.2
  Top Layer w0.6: D3.12@42.5,71.04 40.76,71.04 39.5,72.3 39.5,76.85 41.277,78.627 41.516,78.627 41.522,78.633 58.591,78.633 58.597,78.627 D24.12
LED19_1: D24.2 D24.3 | length 2.5
  Top Layer w0.8: D24.3 D24.2
LED19_2: D24.4 D24.5 | length 2.5
  Top Layer w0.8: D24.5 D24.4
LED19_3: D24.6 D24.7 | length 15.2
  Top Layer w0.8: D24.7 D24.6
LED19_4: D24.8 D24.9 | length 2.5
  Top Layer w0.8: D24.8 D24.9
LED19_5: D24.10 D24.11 | length 2.5
  Top Layer w0.8: D24.10 D24.11
LED20: D3.11 D25.12 | length 62.5
  Top Layer w0.6: D3.11@42.5,69.77 40.43,69.77 38.3,71.9 38.3,103.7 44,109.4 56.87,109.4 D25.12
LED20_1: D25.2 D25.3 | length 2.5
  Top Layer w0.8: D25.3 D25.2
LED20_2: D25.4 D25.5 | length 2.5
  Top Layer w0.8: D25.5 D25.4
LED20_3: D25.6 D25.7 | length 15.2
  Top Layer w0.8: D25.7 D25.6
LED20_4: D25.8 D25.9 | length 2.5
  Top Layer w0.8: D25.8 D25.9
LED20_5: D25.10 D25.11 | length 2.5
  Top Layer w0.8: D25.10 D25.11
LED21: D3.6 D26.12 | length 62
  Top Layer w0.6: D26.12 37,24.53 37,68.2 35.43,69.77 D3.6@32.5,69.77
LED21_1: D26.2 D26.3 | length 2.5
  Top Layer w0.8: D26.3 D26.2
LED21_2: D26.4 D26.5 | length 2.5
  Top Layer w0.8: D26.5 D26.4
LED21_3: D26.6 D26.7 | length 15.2
  Top Layer w0.8: D26.7 D26.6
LED21_4: D26.8 D26.9 | length 2.5
  Top Layer w0.8: D26.8 D26.9
LED21_5: D26.10 D26.11 | length 2.5
  Top Layer w0.8: D26.10 D26.11
LED22: D3.7 D27.12 | length 26.7
  Top Layer w0.6: D27.12 35.6,55.63 35.6,67.8 34.9,68.5 D3.7@32.5,68.5
LED22_1: D27.2 D27.3 | length 2.5
  Top Layer w0.8: D27.3 D27.2
LED22_2: D27.4 D27.5 | length 2.5
  Top Layer w0.8: D27.5 D27.4
LED22_3: D27.6 D27.7 | length 15.2
  Top Layer w0.8: D27.7 D27.6
LED22_4: D27.8 D27.9 | length 2.5
  Top Layer w0.8: D27.8 D27.9
LED22_5: D27.10 D27.11 | length 2.5
  Top Layer w0.8: D27.10 D27.11
LED23: D3.4 D28.12 | length 17.9
  Top Layer w0.6: D28.12 34.33,80.23 35.6,78.96 35.6,72.72 35.19,72.31 D3.4@32.5,72.31
LED23_1: D28.2 D28.3 | length 2.5
  Top Layer w0.8: D28.3 D28.2
LED23_2: D28.4 D28.5 | length 2.5
  Top Layer w0.8: D28.5 D28.4
LED23_3: D28.6 D28.7 | length 15.2
  Top Layer w0.8: D28.7 D28.6
LED23_4: D28.8 D28.9 | length 2.5
  Top Layer w0.8: D28.8 D28.9
LED23_5: D28.10 D28.11 | length 2.5
  Top Layer w0.8: D28.10 D28.11
LED24: D3.5 D29.12 | length 49.1
  Top Layer w0.6: D29.12 37,103.43 37,72.6 35.44,71.04 D3.5@32.5,71.04
LED24_1: D29.2 D29.3 | length 2.5
  Top Layer w0.8: D29.3 D29.2
LED24_2: D29.4 D29.5 | length 2.5
  Top Layer w0.8: D29.5 D29.4
LED24_3: D29.6 D29.7 | length 15.2
  Top Layer w0.8: D29.7 D29.6
LED24_4: D29.8 D29.9 | length 2.5
  Top Layer w0.8: D29.8 D29.9
LED24_5: D29.10 D29.11 | length 2.5
  Top Layer w0.8: D29.10 D29.11
Net1_1: 1.1 D5.18 | length 4
  Top Layer w0.2: D5.18 108.45,44.8 109,44.25 1.1
NetC6_1: C6.1 D4.2 L1.1 | length 5.2
  Top Layer w0.5: L1.1@99.172,30.488 L1.1@99.193,30.509 ; L1.1@99.247,30.941 99.363,30.825 101.137,30.825 101.821,31.509 102.075,31.509 102.133,31.567 103.942,31.567 104,31.625 104.025,31.6 D4.2
NetC6_2: C6.2 D4.6 | length 5.3
  Top Layer w0.5: C6.2@102.075,33.541 106.132,33.541 106.425,33.248 106.425,32.675 106.45,32.65 106.525,32.65 D4.6
NetC9_2: C9.2 D5.8 | length 2.4
  Top Layer w0.2: C9.2@98.516,41.75 98.716,41.55 D5.8
NetC12_2: C12.2 D5.4 | length 2.5
  Top Layer w0.2: C12.2@98.466,43.65 99.087,43.65 99.587,44.15 D5.4
NetD4_4: D4.4 R7.1 R8.2 | length 5.6
  Top Layer w0.5: D4.4 108.1,30.675 108.575,31.15 108.575,32.159 R7.1@108.587,32.172 ; R7.1 108.587,32.346 110.588,32.346 110.763,32.172 R8.2@110.775,32.184
NetD6_1: D6.1 R41.2 | length 2.3
  Top Layer w0.8: R41.2 177.47,15.2 D6.1
NetD7_1: D7.1 R42.2 | length 2.3
  Top Layer w0.8: R42.2 177.47,47.7 D7.1
NetD8_1: D8.1 R43.2 | length 2.3
  Top Layer w0.8: D8.1 190.23,95.5 R43.2
NetD9_1: D9.1 R44.2 | length 2.3
  Top Layer w0.8: D9.1 190.23,128 R44.2
NetD10_1: D10.1 R45.2 | length 2.3
  Top Layer w0.8: D10.1 157.73,30.5 R45.2
NetD11_1: D11.1 R46.2 | length 2.3
  Top Layer w0.8: D11.1 157.73,63 R46.2
NetD12_1: D12.1 R47.2 | length 2.3
  Top Layer w0.8: D12.1 159.954,95.47 R47.2
NetD13_1: D13.1 R48.2 | length 2.3
  Top Layer w0.8: D13.1 159.938,127.97 R48.2
NetD14_1: D14.1 R49.2 | length 2.3
  Top Layer w0.8: D14.1 125.23,30.5 R49.2
NetD15_1: D15.1 R50.2 | length 2.3
  Top Layer w0.8: D15.1 125.23,63 R50.2
NetD16_1: D16.1 R51.2 | length 2.3
  Top Layer w0.8: D16.1 125.23,95.5 R51.2
NetD17_1: D17.1 R52.2 | length 2.3
  Top Layer w0.8: D17.1 125.23,128 R52.2
NetD18_1: D18.1 R53.2 | length 2.5
  Top Layer w0.5: R53.2 R53.2@92.7,28.066
  Top Layer w0.7: D18.1 D18.1@92.73,30.5
  Top Layer w0.8: R53.2@92.7,28.066 D18.1
NetD19_1: D19.1 R54.2 | length 2.3
  Top Layer w0.7: D19.1 94.938,62.97 R54.2
NetD20_1: D20.1 R55.2 | length 2.3
  Top Layer w0.8: D20.1 92.73,95.5 R55.2
NetD21_1: D21.1 R56.2 | length 2.3
  Top Layer w0.8: D21.1 92.73,128 R56.2
NetD22_1: D22.1 R57.2 | length 2.3
  Top Layer w0.8: R57.2 47.47,15.2 D22.1
NetD23_1: D23.1 R58.2 | length 2.3
  Top Layer w0.8: R58.2 47.47,47.7 D23.1
NetD24_1: D24.1 R59.2 | length 2.3
  Top Layer w0.8: D24.1 60.23,95.5 R59.2
NetD25_1: D25.1 R60.2 | length 2.3
  Top Layer w0.8: D25.1 60.23,128 R60.2
NetD26_1: D26.1 R61.2 | length 2.3
  Top Layer w0.8: D26.1 27.73,30.5 R61.2 R61.2@30,30.5
NetD27_1: D27.1 R62.2 | length 2.3
  Top Layer w0.8: D27.1 27.73,63 R62.2
NetD28_1: D28.1 R63.2 | length 2.3
  Top Layer w0.8: D28.1 27.73,95.5 R63.2
NetD29_1: D29.1 R64.2 | length 2.3
  Top Layer w0.8: D29.1 27.73,128 R64.2
NetR5_2: R5.2 S1.1 S1.1_1 | length 14.7
  Top Layer w0.6: S1.1_1 S1.1 192.566,68.666 R5.2 R5.2@192.4,70.734
NetR6_2: R6.2 S2.1 S2.1_1 | length 14.5
  Top Layer w0.6: S2.1_1 S2.1 192.591,86.991 R6.2
SCL: D1.14 D2.14 D3.14 D5.12 R1.1 R26.1 R26.2 | length 223.5
  Top Layer w0.2: D3.14@42.5,73.58 54.32,73.58 77.2,50.7 77.2,44.875 82.825,39.25 89.6,39.25 103.613,53.262 105.35,55 105.35,68.2 106.3,69.15 109.575,69.15 110.8,70.375 110.8,72.055 109.275,73.58 D2.14 105.52,73.58 105,74.1 105,75.1 105.4,75.5 153.9,75.5 157.725,71.675 163.725,71.675 164.835,72.785 164.835,77.424 164.49,77.769 164.49,82.408 164.642,82.56 169.465,82.56 170.25,81.775 170.25,76.375 171.065,75.56 173.682,75.56 173.697,75.575 174.275,74.997 174.275,73.95 173.905,73.58 D1.14 ; R26.1 104.025,46.175 104.285,45.915 104.285,42.315 105.7,40.9 D5.12 109.448,40.9 109.8,40.548 109.8,38.798 R1.1@110.098,38.5
SDA: D1.15 D2.15 D3.15 D5.11 R2.1 | length 218.5
  Top Layer w0.2: D3.15@42.5,74.85 41.025,74.85 40.575,74.4 40.575,73.6 41.225,72.95 54.15,72.95 76.55,50.55 76.55,44.85 82.575,38.825 89.85,38.825 100.775,49.75 ; D2.15 107.55,74.9 112.9,74.9 ; R2.1@108,38.516 108,38.75 107,39.75 D5.11 105.75,40.25 103.925,42.075 103.925,45.35 100.775,48.5 100.775,49.75 ; D1.15 171.1,74.85 170.8,74.55 170.8,73.35 171.2,72.95 173.775,72.95 174.3,72.425 174.3,70.95 173.8,70.45 157.725,70.45 153.275,74.9 112.9,74.9 ; 100.775,49.75 102.675,51.65 104.875,51.65 105.71,52.485 105.71,67.36 106.225,67.875 110.775,67.875 112.525,66.125 114.5,66.125 115.5,67.125 115.5,72.3 112.9,74.9
pads on no net: D1.13 D2.13 D3.13 D5.1 D5.2 D5.3 D5.5 D5.6 D5.10 D5.13 D5.14 D5.15 D5.16 D5.17

## Polygon pours and split planes (outlines as drawn)
GND on Top Layer "GND_L01_P012" (solid, remove dead copper, pour order 12): 0.5,149.5 204.5,149.5 204.5,1 204,0.5 0.5,0.5

## Silkscreen, mask and mechanical layers (free items; w line width, h text height)
Bottom Overlay:
  lines w1: 5,138 5,4.5 200,4.5 200,138 ; 10,143 68,143 ; 137,143 195,143
  text "Binary clock" at 126,140 h10